# Altium PCB switch_board.PcbDoc
Units mm, origin at the board's own origin, x right, y up, seen from the top; angles counter-clockwise.
Board outline 45.57 x 37 mm, 2 copper layers (Top Layer, Bottom Layer), stack 1.571 mm thick; 11 components, 52 nets, 286 pads, 86 vias.
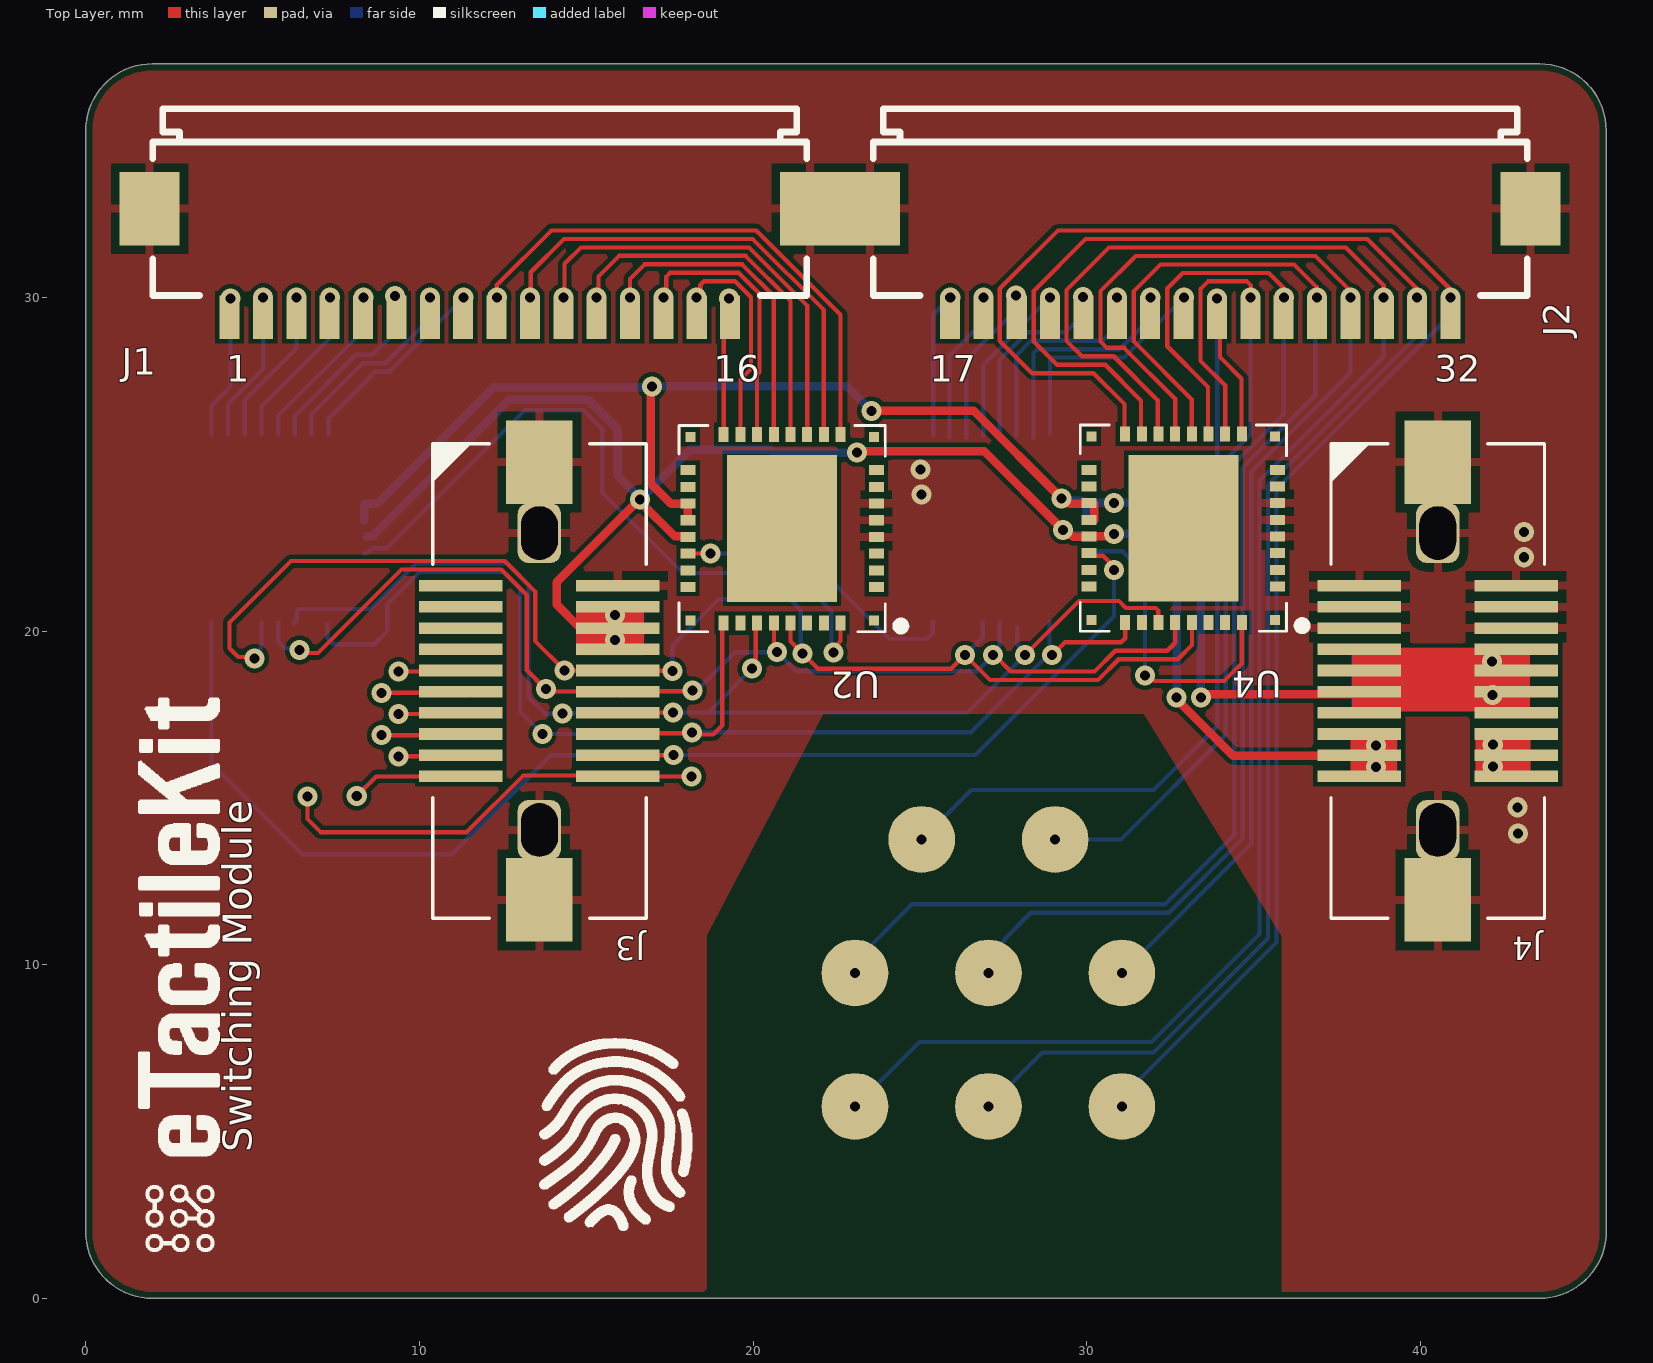
[diagram p0: Top Layer view]
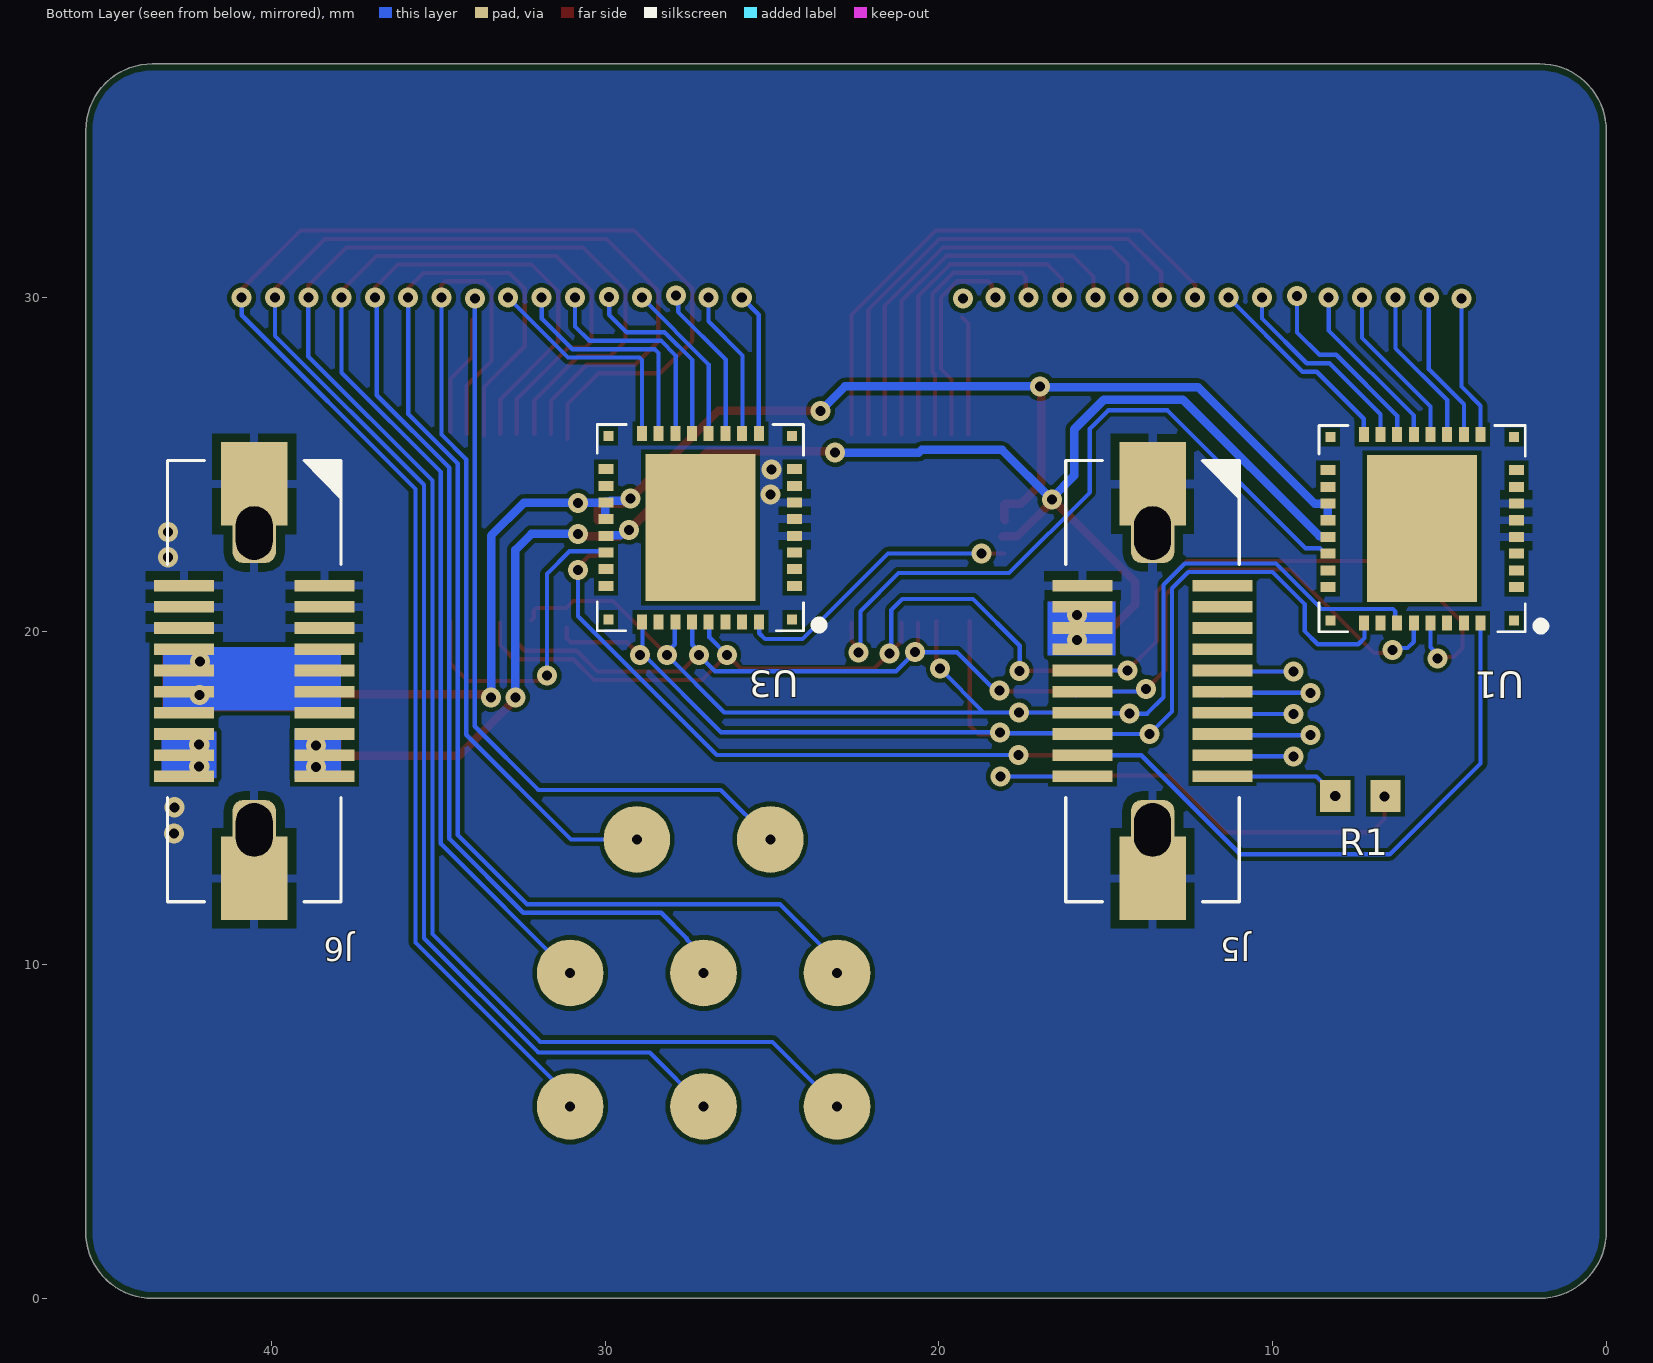
[diagram p1: Bottom Layer view, seen from below]
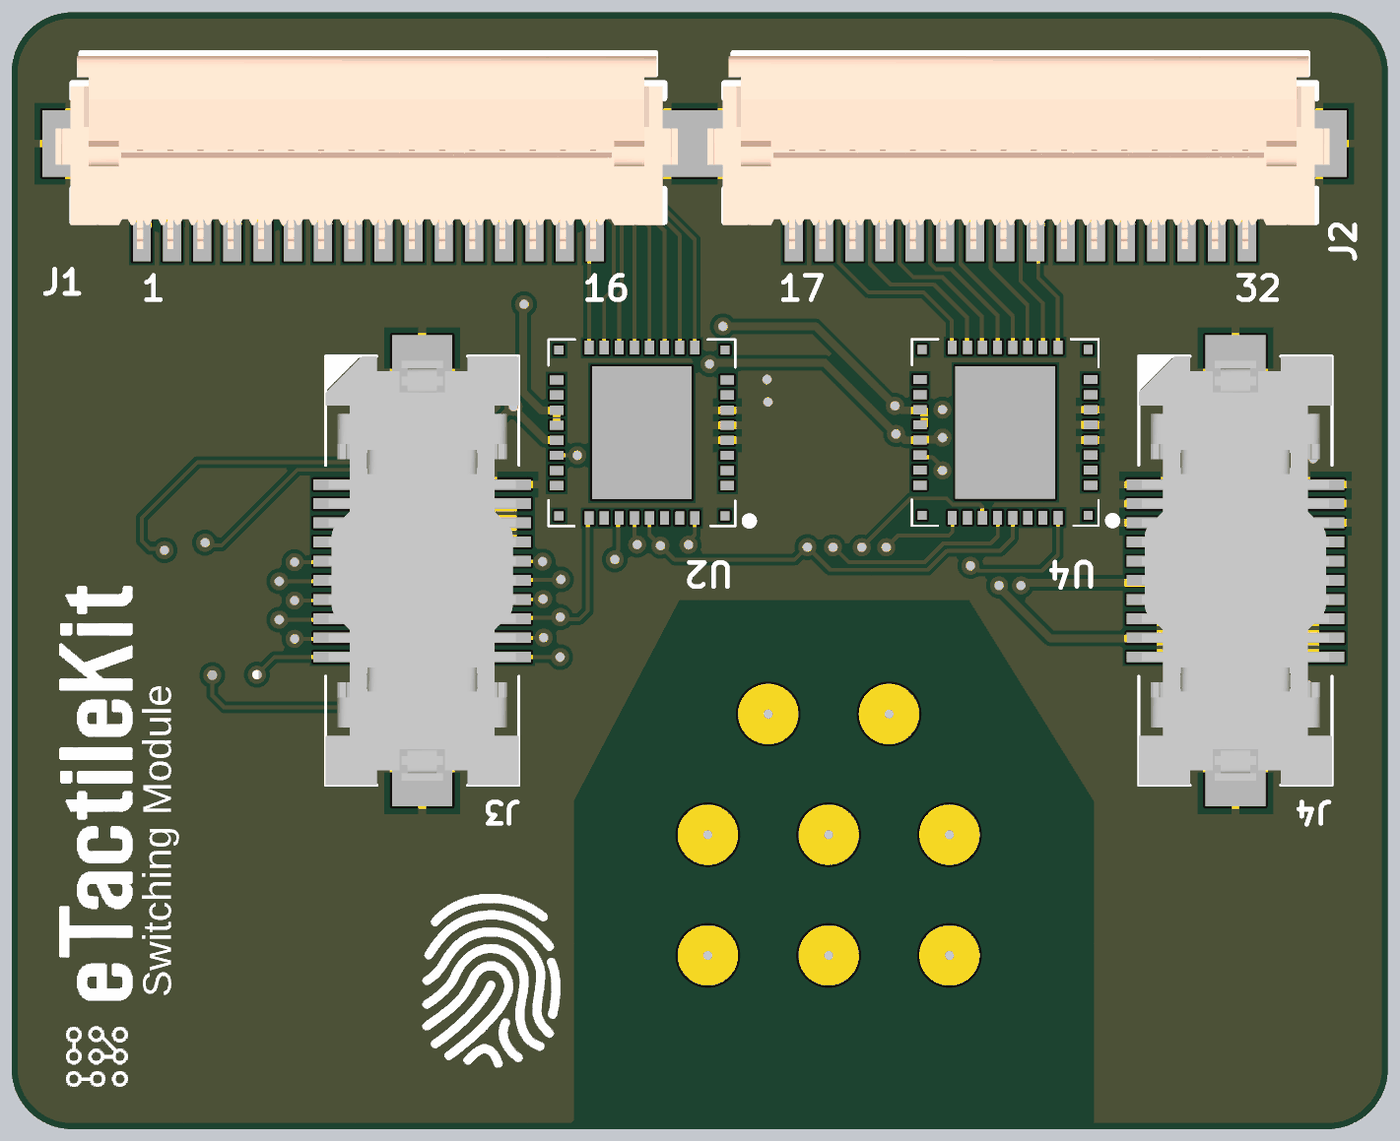
[diagram p2: 3D render of the assembled board from above, using the file's embedded part models]
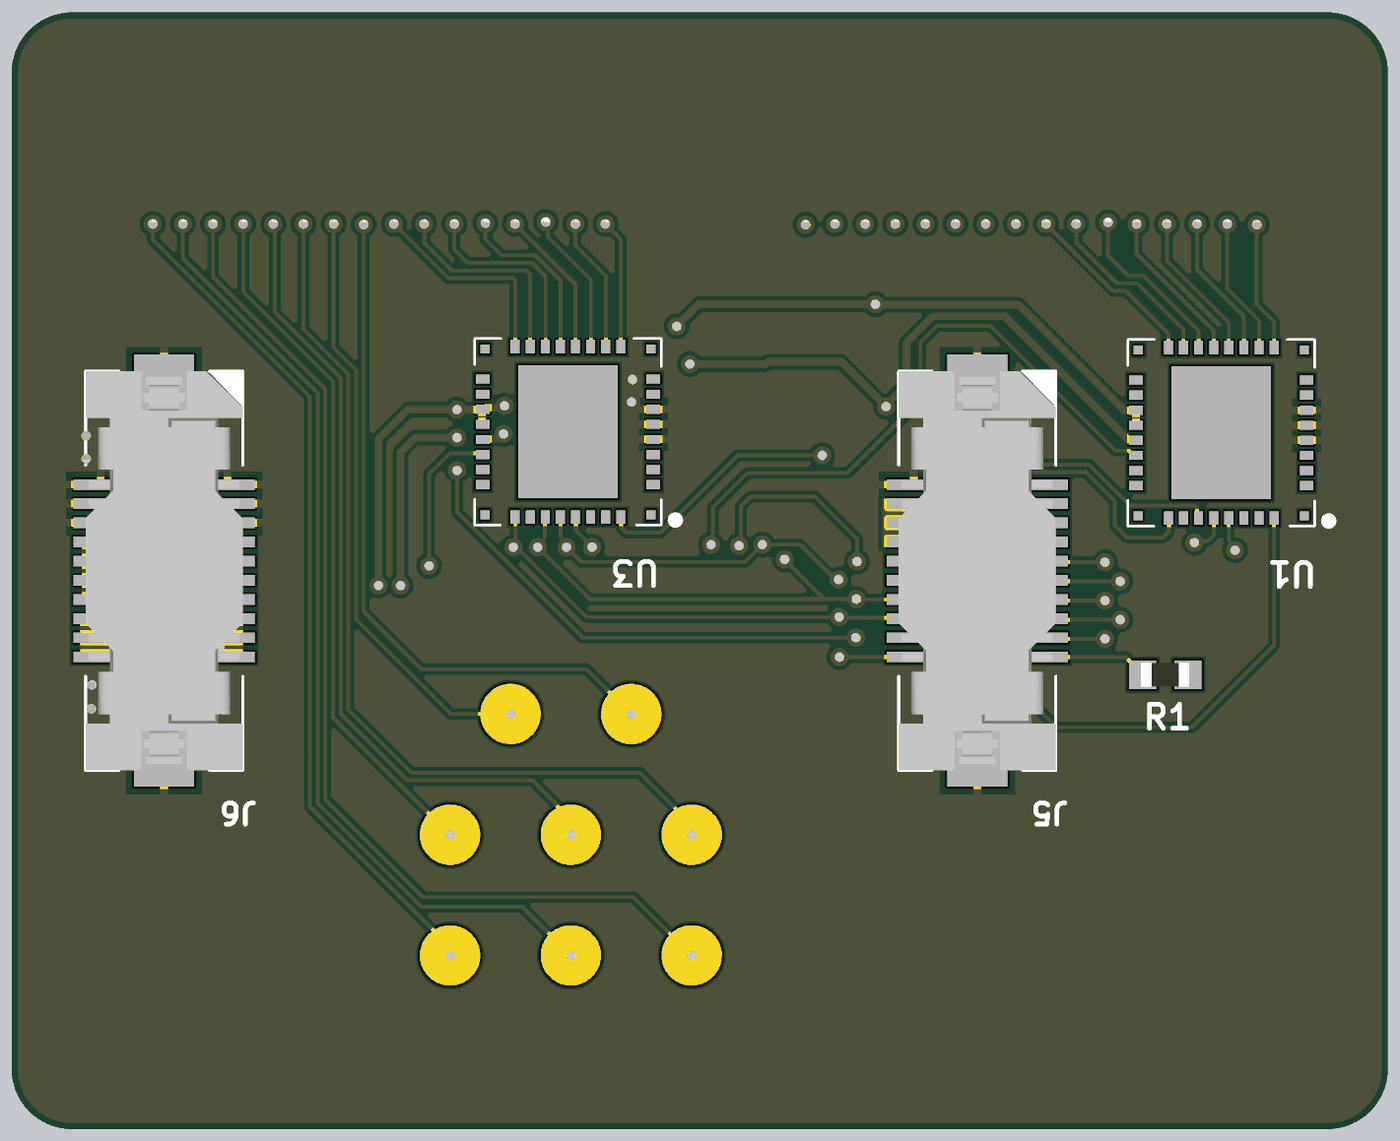
[diagram p3: 3D render of the assembled board from below, using the file's embedded part models]

## Layer stack, top to bottom
Top Solder: solder mask 0.0102, Solder Resist, Dk 3.5
Top Layer: signal copper 0.0356
Dielectric 1: dielectric 1.5, FR-4, Dk 4.8
Bottom Layer: signal copper 0.0356
Bottom Solder: solder mask 0.0102, Solder Resist, Dk 3.5

## Board outline
0,2 ccw(c2,2) 2,0 2,0.001 43.565,0.001 43.567,0 ccw(c43.567,2) 45.567,2 45.567,35 ccw(c43.567,35) 43.567,37 43.562,37.001 2,37.001 2,37 ccw(c2,35) 0,35

## Design rules (kind name [scope] priority, off if disabled: settings)
BoardOutlineClearance [All] p1: gap=0.2 ignorepadtopadclearanceinfootprint=FALSE
Clearance [All] p1: gap=0.127 ignorepadtopadclearanceinfootprint=FALSE except(0.1: Arc-Text Track-Text SMDPad-Text; 0.25: Arc-Hole Track-Hole SMDPad-Hole THPad-Hole Via-Hole Fill-Hole Poly-Hole Region-Hole Text-Hole)
ComponentClearance [All] p1: gap=0.127 collisioncheckmode=3 verticalgap=0.127 showdistances=TRUE
DiffPairsRouting [All] p1: maxlimit=0.254 minlimit=0.127 mostfreqgap=0.127 toplayer_minwidth=0.127 toplayer_maxwidth=25.4 toplayer_prefwidth=0.127 bottomlayer_minwidth=0.127 bottomlayer_maxwidth=25.4 bottomlayer_prefwidth=0.127 maxuncoupledlength=12.7
Height [All] p1: minheight=0 maxheight=1816.048 prefheight=12.7
HoleSize [All] p1: absolutevalues=TRUE maxlimit=6.3 minlimit=0.3 maxpercent=80.000 minpercent=20.000
HoleToHoleClearance [All] p1: gap=0.25 allowstackedmicrovias=FALSE
MinimumAnnularRing [All] p1: minimumring=0.076
MinimumSolderMaskSliver [All] p1: minsoldermaskwidth=0
PlaneClearance [All] p1: clearance=0.127
PlaneConnect PlaneConnectPowerPads [InPadClass('PowerPads')] p1: planeconnectstyle=Direct reliefexpansion=0.508 reliefentries=4 reliefconductorwidth=0.254 reliefairgap=0.254
PlaneConnect [All] p2: pad.planeconnectstyle=Relief pad.reliefexpansion=0.3 pad.reliefentries=4 pad.reliefconductorwidth=0.127 pad.reliefairgap=0.127 via.planeconnectstyle=Direct via.reliefexpansion=0.3 via.reliefentries=4 via.reliefconductorwidth=0.127 via.reliefairgap=0.127
PolygonConnect PolygonConnect_6 [All vs IsNamedPolygon('GND_L02_P000')] p1: thpad.connectstyle=Relief thpad.reliefconductorwidth=0.254 thpad.reliefentries=4 thpad.polygonreliefangle="90 Angle" thpad.airgapwidth=0.254 smdpad.connectstyle=Relief smdpad.reliefconductorwidth=0.254 smdpad.reliefentries=4 smdpad.polygonreliefangle="90 Angle" smdpad.airgapwidth=0.254 via.connectstyle=Direct via.reliefconductorwidth=0.254 via.reliefentries=4 via.polygonreliefangle="90 Angle" via.airgapwidth=0.254
PolygonConnect PolygonConnect_5 [All vs IsNamedPolygon('GND_L01_P001')] p2: thpad.connectstyle=Relief thpad.reliefconductorwidth=0.254 thpad.reliefentries=4 thpad.polygonreliefangle="90 Angle" thpad.airgapwidth=0.254 smdpad.connectstyle=Relief smdpad.reliefconductorwidth=0.254 smdpad.reliefentries=4 smdpad.polygonreliefangle="90 Angle" smdpad.airgapwidth=0.254 via.connectstyle=Direct via.reliefconductorwidth=0.254 via.reliefentries=4 via.polygonreliefangle="90 Angle" via.airgapwidth=0.254
PolygonConnect PolygonConnect_4 [All vs IsNamedPolygon('GND_L02_P000')] p3: connectstyle=Relief reliefconductorwidth=0.254 reliefentries=4 polygonreliefangle="90 Angle" airgapwidth=0.254
PolygonConnect PolygonConnect_3 [All vs IsNamedPolygon('GND_L01_P001')] p4: connectstyle=Relief reliefconductorwidth=0.254 reliefentries=4 polygonreliefangle="90 Angle" airgapwidth=0.254
PolygonConnect PolygonConnect_2 [All vs IsNamedPolygon('GND_L01_P001')] p5: connectstyle=Direct reliefconductorwidth=0.254 reliefentries=4 polygonreliefangle="90 Angle" airgapwidth=0.254
PolygonConnect PolygonConnect_1 [All vs IsNamedPolygon('GND_L02_P000')] p6: connectstyle=Direct reliefconductorwidth=0.254 reliefentries=4 polygonreliefangle="90 Angle" airgapwidth=0.254
PolygonConnect PolygonConnectPowerPads [All vs (InPadClass('PowerPads'))] p7: connectstyle=Direct reliefconductorwidth=0.254 reliefentries=4 polygonreliefangle="90 Angle" airgapwidth=0.254
PolygonConnect [All] p8: thpad.connectstyle=Relief thpad.reliefconductorwidth=0.127 thpad.reliefentries=4 thpad.polygonreliefangle="90 Angle" thpad.airgapwidth=0.127 smdpad.connectstyle=Relief smdpad.reliefconductorwidth=0.127 smdpad.reliefentries=4 smdpad.polygonreliefangle="90 Angle" smdpad.airgapwidth=0.127 via.connectstyle=Direct via.reliefconductorwidth=0.127 via.reliefentries=4 via.polygonreliefangle="90 Angle" via.airgapwidth=0.127
RoutingVias [All] p1: holewidth=0.3 width=0.6 viastyle="Through Hole" minholewidth=0.3 minwidth=0.6 maxholewidth=0.6 maxwidth=6.6
SilkToSilkClearance [All] p1: silktosilkclearance=0
SilkToSolderMaskClearance [IsPad] p1: minsilkscreentomaskgap=0.127 clearancetoexposedcopper=TRUE
SolderMaskExpansion [All] p1: expansion=0.075 istentingtop=FALSE
SupplyNets "Schematic Supply Nets_4" [InNet('+3V3_L')] p1: voltage=0.000
SupplyNets "Schematic Supply Nets_3" [InNet('GND')] p2: voltage=0.000
SupplyNets "Schematic Supply Nets_2" [InNet('+5V')] p3: voltage=0.000
Width [All] p1: maxlimit=25.4 minlimit=0.127 preferedwidth=0.127 minimp=50.000000 maximp=50.000000 favimp=50.000000
20 further rules are at their usual default settings.

## Classes and differential pairs
component class Switching_circuit: J1 J2 U1 U2 U3 U4
component class connectors: J3 J4 J5 J6 R1

## Components (designator, comment, footprint, x,y, rotation, side; value= is the part's Value field where it differs from the comment)
J1 "FH12-16S-1SH_55_" FH1216S1SH55 11.811,32.531 r0 top
J2 "FH12-16S-1SH_55_" FH1216S1SH55 33.401,32.531 r0 top
J3 "52885-0274" 528850274 13.594,18.501 r270 top
J4 "52885-0274" 528850274 40.518,18.501 r270 top
J5 "53647-0274" 536470274 13.594,18.501 r270 bottom
J6 "53647-0274" 536470274 40.518,18.501 r270 bottom
R1 "MCT06030C6042FP500" RESC1608X55N 7.371,15.056 r0 bottom
U1 "HV513-QFN" HV513-QFN 5.516,23.071 r0 bottom
U2 "HV513-QFN" HV513-QFN 20.869,23.071 r180 top
U3 "HV513-QFN" HV513-QFN 27.147,23.102 r0 bottom
U4 "HV513-QFN" HV513-QFN 32.897,23.083 r180 top

## Footprints (in the part's own frame and the unit in brackets; to place one, negate y for a bottom-side part, rotate by r counter-clockwise, add the part's x,y. Pads: shape width x height; smd on the part's side, far side on the other; paste and mask are expansions set on the pad)
528850274 [mm]
  rect 0.35x2.5 smd: 1(-2.857,-2.35) 2(-2.857,2.35) 3(-2.223,-2.35) 4(-2.223,2.35) 5(-1.587,-2.35) 6(-1.587,2.35) 7(-0.952,-2.35) 8(-0.952,2.35) 9(-0.317,-2.35) 10(-0.317,2.35) 11(0.317,-2.35) 12(0.317,2.35) 13(0.953,-2.35) 14(0.953,2.35) 15(1.588,-2.35) 16(1.588,2.35) 17(2.223,-2.35) 18(2.223,2.35) 19(2.857,-2.35) 20(2.857,2.35)
  rect 2.5x2 smd: 21(-6.56,0) 22(6.56,0)
  silkscreen extent -7.11,-3.2 7.11,3.2, body extent -7.11,-3.2 7.11,3.2, height 4.2
536470274 [mm]
  rect 0.35x1.8 smd: 1(-2.857,-2.1) 2(-2.857,2.1) 3(-2.223,-2.1) 4(-2.223,2.1) 5(-1.588,-2.1) 6(-1.588,2.1) 7(-0.953,-2.1) 8(-0.953,2.1) 9(-0.317,-2.1) 10(-0.317,2.1) 11(0.317,-2.1) 12(0.317,2.1) 13(0.953,-2.1) 14(0.953,2.1) 15(1.588,-2.1) 16(1.588,2.1) 17(2.223,-2.1) 18(2.223,2.1) 19(2.857,-2.1) 20(2.857,2.1)
  rect 2.5x2 smd: 21(-5.91,0) 22(5.91,0)
  silkscreen extent -6.61,-2.6 6.61,2.6, body extent -6.61,-2.6 6.61,2.6, height 7.2
FH1216S1SH55 [mm]
  rect 0.6x1.3 smd: 1(7.5,-3.125) 2(6.5,-3.125) 3(5.5,-3.125) 4(4.5,-3.125) 5(3.5,-3.125) 6(2.5,-3.125) 7(1.5,-3.125) 8(0.5,-3.125) 9(-0.5,-3.125) 10(-1.5,-3.125) 11(-2.5,-3.125) 12(-3.5,-3.125) 13(-4.5,-3.125) 14(-5.5,-3.125) 15(-6.5,-3.125) 16(-7.5,-3.125)
  rect 1.8x2.2 smd: 17(9.9,0.125) 18(-9.9,0.125)
  silkscreen extent -9.8,-2.47 9.8,3.13, body extent -10.36,-3.38 10.24,3.02, height 2.04
HV513-QFN [mm]
  rect 0.45x0.3 smd: 1(-2.825,1.75) 2(-2.825,1.25) 3(-2.825,0.75) 4(-2.825,0.25) 5(-2.825,-0.25) 6(-2.825,-0.75) 7(-2.825,-1.25) 8(-2.825,-1.75) 17(2.825,-1.75) 18(2.825,-1.25) 19(2.825,-0.75) 20(2.825,-0.25) 21(2.825,0.25) 22(2.825,0.75) 23(2.825,1.25) 24(2.825,1.75)
  rect 0.3x0.45 smd: 9(-1.75,-2.825) 10(-1.25,-2.825) 11(-0.75,-2.825) 12(-0.25,-2.825) 13(0.25,-2.825) 14(0.75,-2.825) 15(1.25,-2.825) 16(1.75,-2.825) 25(1.75,2.825) 26(1.25,2.825) 27(0.75,2.825) 28(0.25,2.825) 29(-0.25,2.825) 30(-0.75,2.825) 31(-1.25,2.825) 32(-1.75,2.825)
  rect 0.3x0.3 smd: 33(-2.75,2.75) 34(-2.75,-2.75) 35(2.75,-2.75) 36(2.75,2.75)
  rect 3.3x4.4 smd: 37(0,0)
  silkscreen extent -3.68,-3.09 3.09,3.09, body extent -2.92,-2.92 2.92,2.92, height 0.81
RESC1608X55N [mm]
  rect 0.9x0.95 smd: 1(-0.75,0) 2(0.75,0)
  body extent -0.8,-0.4 0.8,0.4, height 0.55

## Part data
J1 J2: "Connector", Arrow Part Number=FH12-16S-1SH(55), Manufacturer_Name=Hirose, Mouser Part Number=798-FH12-16S-1SH55, Arrow Price/Stock=https://www.arrow.com/en/products/fh12-16s-1sh-55/hirose-electric, Datasheet Link=https://www.hirose.com/en/product/document?clcode=CL0586-0536-8-55&productname=FH12-16S-1SH(55)&series=FH12&documenttype=2DDrawing&lang=en&documentid=0000987749, Height=2.2mm, Manufacturer_Part_Number=FH12-16S-1SH(55), Mouser Price/Stock=https://www.mouser.co.uk/ProductDetail/Hirose-Connector/FH12-16S-1SH55?qs=Ux3WWAnHpjBc3pYMMfcXYg%3D%3D
J3 J4: "Connector", Manufacturer_Name=Molex, Mouser Part Number=538-52885-0274, Datasheet Link=https://www.molex.com/webdocs/datasheets/pdf/en-us/0528850274_PCB_RECEPTACLES.pdf, Height=4mm, Manufacturer_Part_Number=52885-0274, Mouser Price/Stock=https://www.mouser.co.uk/ProductDetail/Molex/52885-0274?qs=%252BPJ3Ll1xQNYiQig4hWY5jQ%3D%3D
J5 J6: "Connector", Manufacturer_Name=Molex, Mouser Part Number=538-53647-0274, Datasheet Link=https://www.molex.com/pdm_docs/sd/536470274_sd.pdf, Height=7mm, Manufacturer_Part_Number=53647-0274, Mouser Price/Stock=https://www.mouser.co.uk/ProductDetail/Molex/53647-0274?qs=8nk6kXN3TSGT9To7JpUGHA%3D%3D
R1: "Resistor", Manufacturer_Name=Vishay, Datasheet Link=http://www.vishay.com/docs/28705/mcx0x0xpro.pdf, Height=0.55mm, Manufacturer_Part_Number=MCT06030C6042FP500

## Free pads (board coordinates)
  round 2 hole 0.3: 1(25.051,13.753) 2(29.051,13.753) 3(23.051,9.753) 4(27.051,9.753) 5(31.051,9.753) 6(23.051,5.753) 7(27.051,5.753) 8(31.051,5.753)
  rrect50% 1.3x1.8 hole 1.1 slot 1.6 at 90 deg: 10(13.594,14.04) 10(13.594,22.937) 10(40.518,14.04) 10(40.518,22.937)

## Via types
v1: diameter 0.6, hole 0.3, Top Layer to Bottom Layer, tented both sides, 86 vias

## Nets (pads, with @x,y where several pads share a name; then routed paths per layer and width w, separated by ;. In a path a pad name is that pad's centre, name@x,y a point inside that pad or via, vN(x,y) a via of type N, cw(c..) or ccw(c..) an arc to the next point about the centre after c; other vN are vias at no path point)
+3V3_L: J4.16 J4.18 J4.20 J6.15 J6.17 J6.19
  other v1: 42.166,15.938 42.166,16.593
+5V: J3.4 J3.6 J3.8 J4.15 J4.17 J4.19 J5.3 J5.5 J5.7 J6.16 J6.18 J6.20 U1.21 U2.21 U3.21 U4.21 | length 49.9
  Top Layer w0.254: J3.6@15.944,20.067 15.674,19.797 15.575,19.797 15.236,20.136 14.769,20.136 14.114,20.791 14.114,21.469 16.581,23.936 v1(16.614,23.936) ; v1@16.643,23.907 16.643,23.847 17.654,22.836 18.09,22.836 U2.21@18.103,22.823 ; v1(23.107,25.349) 23.152,25.393 26.921,25.393 v1(29.28,23.034) 29.373,23.034 29.587,22.821 U4.21@30.219,22.821 ; U4.21@30.215,22.84 30.221,22.846 30.754,22.846 v1(30.82,22.912) ; v1(32.692,18.012) 32.692,17.955 34.39,16.257 J4.17@38.144,16.257
  Bottom Layer w0.254: U1.21@8.426,22.831 8.439,22.844 8.598,22.844 12.686,26.931 15.057,26.931 15.942,26.046 15.942,24.659 16.614,23.987 v1(16.614,23.936) 18.104,25.426 20.52,25.426 20.598,25.349 v1(23.107,25.349) ; v1(29.28,23.034) 29.373,23.034 29.533,22.875 U3.21@29.992,22.875 ; v1(30.82,22.912) 32.213,22.912 32.692,22.434 v1(32.692,18.012)
  other v1: 38.67,15.919 38.662,16.574 15.861,19.735 15.855,20.474
\S\T\A\C\K\_\S\E\N\S\E\: J3.20 J5.19 R1.1 | length 15.5
  Top Layer w0.127: v1(6.645,15.043) 6.645,14.365 7.037,13.973 11.365,13.973 11.417,13.973 13.114,15.669 15.944,15.669 15.972,15.641 18.157,15.641 v1(18.159,15.639)
  Bottom Layer w0.127: J5.19 15.697,15.641 18.157,15.641 v1(18.159,15.639)
BL: J3.16 J5.15 U1.25 U2.25 U3.25 U4.25 | length 38.8
  Top Layer w0.127: J3.16 15.97,16.939 18.14,16.939 v1(18.167,16.966) 18.233,16.9 18.807,16.9 19.075,17.168 U2.25@19.075,20.297 ; v1(28.958,19.279) 29.343,19.664 31.029,19.664 31.151,19.786 U4.25@31.151,20.103
  Bottom Layer w0.127: U1.25@7.245,20.211 7.245,19.792 7.432,19.606 8.645,19.606 9.038,19.999 9.038,20.806 10,21.768 12.528,21.768 13.014,21.282 13.014,17.587 v1(13.691,16.91) 13.692,16.912 15.693,16.912 J5.15 15.72,16.939 18.14,16.939 v1(18.167,16.966) 26.527,16.966 v1@28.841,19.279 ; U3.25@28.883,20.29 28.883,19.354 v1(28.958,19.279)
CLK: J3.12 J5.11 U1.28 U2.28 U3.28 U4.28 | length 37.6
  Top Layer w0.127: v1(6.406,19.431) 6.496,19.341 6.831,19.341 6.833,19.339 6.96,19.339 9.465,21.844 12.452,21.844 13.214,21.083 13.214,18.83 v1(13.787,18.257) 13.854,18.19 J3.12@15.309,18.19 ; J3.12@15.311,18.187 15.322,18.198 18.173,18.198 v1(18.187,18.212) ; U2.28@20.627,20.246 20.627,19.45 v1(20.711,19.365) ; v1(27.195,19.279) 27.229,19.279 27.719,18.789 30.233,18.789 30.854,19.41 32.412,19.41 32.651,19.649 U4.28@32.651,20.103
  Bottom Layer w0.127: U1.28 5.766,19.679 5.953,19.492 6.345,19.492 v1(6.406,19.431) ; v1(13.787,18.257) 13.859,18.185 15.22,18.185 15.246,18.159 15.828,18.159 J5.11@15.914,18.072 ; v1(18.187,18.212) 18.303,18.212 19.456,19.365 v1(20.711,19.365) 21.282,18.795 26.71,18.795 v1(27.195,19.279) 27.195,19.392 27.392,19.59 U3.28@27.392,20.265
DIN_1: J5.17 U1.32 | length 18.8
  Bottom Layer w0.127: U1.32 3.766,16.032 6.485,13.313 10.97,13.313 13.935,16.278 J5.17@16.021,16.278
DIN_2: U1.22 U2.32 | length 21.6
  Top Layer w0.127: v1(22.411,19.361) 22.411,19.489 22.619,19.698 U2.32
  Bottom Layer w0.127: U1.22 8.416,22.32 8.575,22.48 9.014,22.48 13.148,26.614 14.925,26.614 15.475,26.064 15.475,24.156 17.895,21.736 21.211,21.736 22.352,20.595 22.352,19.42 v1(22.411,19.361)
DIN_3: U2.22 U3.32 | length 8.8
  Top Layer w0.127: U2.22 18.047,22.323 18.727,22.323 v1(18.729,22.325)
  Bottom Layer w0.127: v1(18.729,22.325) 21.524,22.325 24.09,19.759 25.206,19.759 25.383,19.936 25.383,20.263 U3.32
DIN_4: U3.22 U4.32 | length 9.6
  Top Layer w0.127: v1(31.745,18.665) 31.873,18.665 32.036,18.502 34.117,18.502 34.642,19.028 U4.32@34.642,20.287
  Bottom Layer w0.127: U3.22@29.92,22.392 31.066,22.392 31.745,21.714 v1(31.745,18.665)
DOUT: J3.18 U4.22 | length 18.8
  Top Layer w0.127: J3.18 15.947,16.281 17.612,16.281 v1(17.615,16.283) ; U4.22@30.219,22.32 30.281,22.258 30.488,22.258 30.818,21.927 v1(30.818,21.824)
  Bottom Layer w0.127: v1(17.615,16.283) 26.656,16.283 30.818,20.445 v1@30.818,21.823
GND: J1.17 J1.18 J2.17 J2.18 J3.2 J3.21 J3.22 J4.1 J4.2 J4.3 J4.4 J4.5 J4.6 J4.21 J4.22 J5.1 J5.21 J5.22 J6.1 J6.2 J6.3 J6.4 J6.5 J6.6 J6.21 J6.22 pad.10 U1.4 U1.5 U1.6 U2.4 U2.5 U2.6 U3.4 U3.5 U3.6 U4.4 U4.5 U4.6
  other v1: 42.926,13.928 42.911,14.719 43.1,22.212 43.1,22.974 25.042,24.092 25.01,24.839
HVL_BL: J3.15 J5.16 | length 5.9
  Top Layer w0.127: v1(8.86,16.879) J3.15@11.654,16.879
  Bottom Layer w0.127: v1(8.86,16.879) J5.16@11.947,16.879
HVL_CLK: J3.11 J5.12 | length 5.2
  Top Layer w0.127: v1(8.86,18.149) J3.11@11.433,18.149
  Bottom Layer w0.127: v1(8.86,18.149) 11.412,18.149 J5.12@11.489,18.072
HVL_DIOB: J3.17 J5.18 | length 5
  Top Layer w0.127: v1(9.368,16.244) J3.17@12.329,16.244
  Bottom Layer w0.127: v1(9.368,16.244) J5.18@11.447,16.244
HVL_LE: J3.9 J5.10 | length 5
  Top Layer w0.127: v1(9.368,18.784) 11.686,18.784 J3.9@11.735,18.833
  Bottom Layer w0.127: v1(9.368,18.784) J5.10@11.999,18.784
HVL_POL: J3.13 J5.14 | length 5.1
  Top Layer w0.127: v1(9.368,17.514) J3.13@12.333,17.514
  Bottom Layer w0.127: v1(9.368,17.514) 11.463,17.514 J5.14@11.495,17.547
LE: J3.10 J5.9 U1.29 U2.29 U3.29 U4.29 | length 43.6
  Top Layer w0.127: v1(5.06,19.182) 5.017,19.224 4.569,19.224 4.309,19.484 4.309,20.259 6.148,22.098 12.558,22.098 13.468,21.188 13.468,19.703 v1(14.353,18.818) 14.883,18.818 14.89,18.812 17.572,18.812 v1(17.578,18.805) ; U2.29 21.119,19.693 v1(21.482,19.331) 21.942,18.871 25.934,18.871 v1(26.348,19.285) 27.098,18.535 30.338,18.535 30.959,19.156 32.725,19.156 33.151,19.581 U4.29@33.151,20.251
  Bottom Layer w0.127: v1(5.06,19.182) 5.06,19.31 5.266,19.516 U1.29 ; v1(14.353,18.818) J5.9@16.506,18.818 ; v1(17.578,18.805) 17.578,19.561 18.973,20.957 21.099,20.957 21.428,20.628 21.428,19.385 v1(21.482,19.331) ; v1(26.348,19.285) 26.88,19.817 U3.29@26.88,20.271
OUT1_1: J1.16 U1.9 | length 4.3
  Bottom Layer w0.127: U1.9 3.766,26.753 4.341,27.328 v1(4.341,29.968)
OUT1_2: J1.15 U1.10 | length 4.8
  Bottom Layer w0.127: U1.10 4.266,26.796 5.318,27.848 v1(5.318,29.991) v1@5.076,29.991
OUT1_3: J1.14 U1.11 | length 5
  Bottom Layer w0.127: U1.11 4.766,26.921 6.318,28.473 v1(6.318,29.991) v1@6.076,29.991
OUT1_4: J1.13 U1.12 | length 5.2
  Bottom Layer w0.127: U1.12 5.266,26.729 7.318,28.781 v1(7.318,29.991) v1@7.076,29.991
OUT1_5: J1.12 U1.13 | length 5.4
  Bottom Layer w0.127: U1.13 5.766,26.456 8.318,29.009 v1(8.318,29.991) v1@8.076,29.991
OUT1_6: J1.11 U1.14 | length 5.7
  Bottom Layer w0.127: U1.14 6.266,26.453 8.092,28.279 8.594,28.279 9.265,28.95 v1(9.265,30.044)
OUT1_7: J1.10 U1.15 | length 6.2
  Bottom Layer w0.127: U1.15 6.766,26.497 8.294,28.025 8.975,28.025 10.318,29.368 v1(10.318,29.991) v1@10.076,29.991
OUT1_8: J1.9 U1.16 | length 6.3
  Bottom Layer w0.127: U1.16 7.266,26.361 8.676,27.771 9.099,27.771 v1(11.319,29.991) v1@11.076,29.991
OUT2_1: J1.8 U2.9 | length 16
  Top Layer w0.127: v1(12.319,29.991) 12.319,30.372 13.952,32.006 20.092,32.006 22.619,29.478 U2.9
OUT2_2: J1.7 U2.10 | length 14.6
  Top Layer w0.127: v1(13.317,29.991) 13.333,29.991 13.335,29.993 13.335,30.753 14.333,31.752 19.987,31.752 22.119,29.619 U2.10
OUT2_3: J1.6 U2.11 | length 13.1
  Top Layer w0.127: v1(14.314,29.991) 14.349,29.991 14.351,29.993 14.351,31.007 14.841,31.498 19.881,31.498 21.619,29.76 U2.11
OUT2_4: J1.5 U2.12 | length 11.3
  Top Layer w0.127: v1(15.312,29.991) 15.365,29.991 15.367,29.993 15.367,30.626 15.984,31.244 19.776,31.244 21.119,29.901 U2.12
OUT2_5: J1.4 U2.13 | length 9.6
  Top Layer w0.127: v1(16.31,29.991) 16.31,30.554 16.746,30.99 19.671,30.99 20.619,30.041 U2.13
OUT2_6: J1.3 U2.14 | length 8.1
  Top Layer w0.127: v1(17.308,29.991) 17.397,29.991 17.399,29.993 17.399,30.626 17.508,30.736 19.566,30.736 20.193,30.109 20.193,27.753 20.119,27.68 U2.14
OUT2_7: J1.2 U2.15 | length 6.5
  Top Layer w0.127: v1(18.306,29.991) 18.413,29.991 18.415,29.993 18.415,30.372 18.524,30.482 19.46,30.482 19.939,30.004 19.939,27.858 19.619,27.539 U2.15
OUT2_8: J1.1 U2.16 | length 3.8
  Top Layer w0.127: J1.1@19.05,29.991 19.257,29.991 v1(19.28,29.968) ; U2.16 19.119,29.215 J1.1
OUT3_1: J2.16 U3.9 | length 4.4
  Bottom Layer w0.127: U3.9@25.398,25.849 25.398,29.481 v1(25.908,29.991)
OUT3_2: J2.15 U3.10 | length 4.6
  Bottom Layer w0.127: U3.10@25.886,25.811 25.886,28.261 26.908,29.283 26.908,29.984 v1(26.901,29.991)
OUT3_3: J2.14 U3.11 | length 4.9
  Bottom Layer w0.127: U3.11@26.386,25.811 26.386,28.14 27.813,29.567 27.813,29.989 v1(27.882,30.057)
OUT3_4: J2.13 U3.12 | length 5
  Bottom Layer w0.127: U3.12@26.9,25.843 26.9,27.99 v1(28.901,29.991)
OUT3_5: J2.12 U3.13 | length 5.8
  Bottom Layer w0.127: U3.13@27.388,25.869 27.388,28.119 28.225,28.956 29.357,28.956 29.882,29.48 v1(29.882,30.018)
OUT3_6: J2.11 U3.14 | length 6.6
  Bottom Layer w0.127: U3.14@27.889,25.856 27.889,28.261 28.33,28.702 30.48,28.702 30.908,29.13 v1(30.908,29.991)
OUT3_7: J2.10 U3.15 | length 7.1
  Bottom Layer w0.127: U3.15@28.402,25.785 28.402,28.333 28.517,28.448 30.988,28.448 31.899,29.359 31.899,29.981 v1(31.908,29.991)
OUT3_8: J2.9 U3.16 | length 7
  Bottom Layer w0.127: U3.16 28.897,28.12 28.971,28.194 31.111,28.194 v1(32.909,29.991)
OUT4_1: J2.8 pad.1 U4.9 | length 26.8
  Top Layer w0.127: J2.8 33.99,29.317 33.99,28.209 34.639,27.56 U4.9@34.639,25.968
  Bottom Layer w0.127: pad.1 26.538,15.24 32.004,15.24 33.909,17.145 v1(33.909,29.972)
OUT4_2: J2.7 pad.2 U4.10 | length 26.5
  Top Layer w0.127: U4.10 34.147,27.361 33.41,28.098 33.41,30.255 33.635,30.48 34.798,30.48 34.925,30.353 34.925,29.993 34.908,29.993 v1(34.907,29.991)
  Bottom Layer w0.127: pad.2 31.025,13.753 34.163,16.891 34.163,25.146 34.907,25.89 v1(34.907,29.991)
OUT4_3: J2.6 pad.3 U4.11 | length 39.1
  Top Layer w0.127: U4.11@33.628,25.863 33.628,27.317 32.41,28.535 32.41,30.271 32.873,30.734 35.452,30.734 35.904,30.282 v1(35.904,29.991)
  Bottom Layer w0.127: pad.3 23.051,10.097 24.765,11.811 32.343,11.811 34.417,13.885 34.417,25.019 35.904,26.506 v1(35.904,29.991)
OUT4_4: J2.5 pad.4 U4.12 | length 38.2
  Top Layer w0.127: U4.12 33.147,26.94 31.41,28.677 31.41,30.187 32.212,30.988 36.214,30.988 36.902,30.3 v1(36.902,29.991)
  Bottom Layer w0.127: pad.4 27.051,10.256 27.559,10.764 27.559,10.795 28.321,11.557 32.455,11.557 34.671,13.773 34.671,24.892 36.846,27.067 36.846,29.935 v1(36.902,29.991)
OUT4_5: J2.4 pad.5 U4.13 | length 37.1
  Top Layer w0.127: U4.13 32.647,26.96 31.12,28.487 30.6,28.487 30.41,28.677 30.41,30.187 31.465,31.242 36.849,31.242 37.9,30.191 v1(37.9,29.991)
  Bottom Layer w0.127: pad.5 34.925,13.627 34.925,24.765 37.9,27.74 v1(37.9,29.991)
OUT4_6: J2.3 pad.6 U4.14 | length 51.8
  Top Layer w0.127: U4.14@32.127,25.902 32.127,26.914 30.808,28.233 29.854,28.233 29.391,28.696 29.391,30.221 30.666,31.496 37.758,31.496 38.898,30.356 v1(38.898,29.991)
  Bottom Layer w0.127: pad.6 24.984,7.686 31.943,7.686 35.179,10.922 35.179,24.511 38.898,28.23 v1(38.898,29.991)
OUT4_7: J2.2 pad.7 U4.15 | length 51
  Top Layer w0.127: U4.15@31.627,25.902 31.627,26.904 30.552,27.979 29.108,27.979 28.41,28.677 28.41,30.194 29.966,31.75 38.404,31.75 39.896,30.258 v1(39.896,29.991)
  Bottom Layer w0.127: pad.7 28.664,7.366 32.004,7.366 35.433,10.795 35.433,24.384 39.896,28.847 v1(39.896,29.991)
OUT4_8: J2.1 pad.8 U4.16 | length 50.7
  Top Layer w0.127: U4.16@31.127,25.756 31.127,26.8 30.202,27.725 28.362,27.725 27.391,28.696 27.391,30.26 29.135,32.004 39.135,32.004 40.894,30.245 v1(40.894,29.991)
  Bottom Layer w0.127: pad.8 31.051,6.032 35.687,10.668 35.687,24.257 40.894,29.464 v1(40.894,29.991)
POL: J3.14 J5.13 U1.27 U2.27 U3.27 U4.27 | length 38.4
  Top Layer w0.127: J3.14 15.951,17.555 17.591,17.555 v1(17.598,17.563) ; v1(19.971,18.875) 20.062,18.965 20.062,19.17 20.078,19.186 U2.27@20.078,20.3 ; v1(28.147,19.279) 29.767,20.899 30.961,20.899 31.168,20.692 32.065,20.692 32.139,20.618 32.139,20.4 U4.27@32.213,20.326
  Bottom Layer w0.127: U1.27@6.227,20.223 6.319,20.315 6.319,20.587 6.394,20.661 8.534,20.661 9.895,22.022 12.633,22.022 13.268,21.387 13.268,18.014 13.758,17.524 v1(14.293,17.524) 14.305,17.536 15.682,17.536 J5.13 15.701,17.555 17.591,17.555 v1(17.598,17.563) 18.659,17.563 ; v1(19.971,18.875) 18.659,17.563 ; U3.27@27.916,20.098 27.916,19.601 28.147,19.37 v1(28.147,19.279) 26.431,17.563 18.659,17.563
STACK_SENSE: J3.19 J5.20 R1.2 | length 6.4
  Top Layer w0.127: v1(8.121,15.056) 8.709,15.644 J3.19@10.6,15.644
  Bottom Layer w0.127: R1.2@8.121,15.015 8.121,15.081 8.684,15.644 J5.20
Vpp: J4.7 J4.8 J4.9 J4.10 J4.11 J4.12 J4.13 J4.14 J6.7 J6.8 J6.9 J6.10 J6.11 J6.12 J6.13 J6.14 U1.19 U1.20 U2.19 U2.20 U3.19 U3.20 U4.19 U4.20 | length 47.6
  Top Layer w0.254: v1(16.966,27.331) 16.934,27.299 16.934,24.422 17.545,23.811 18.031,23.811 18.044,23.798 18.044,23.343 U2.20@18.024,23.323 ; v1(23.549,26.599) 26.614,26.599 v1(29.247,23.966) 29.341,23.966 29.486,23.821 30.219,23.821 U4.20@30.219,23.32 ; v1(33.419,18.012) 33.512,18.012 33.6,18.1 38.082,18.1 38.168,18.186 40.271,18.186 40.622,18.536
  Bottom Layer w0.254: U1.20 U1.19 ; U1.19@8.452,23.821 8.739,23.821 12.23,27.312 16.947,27.312 v1(16.966,27.331) 22.817,27.331 v1(23.549,26.599) ; v1(29.247,23.966) 29.314,23.9 29.849,23.9 29.874,23.875 29.994,23.875 30.023,23.846 30.814,23.846 v1(30.82,23.84) 32.44,23.84 33.419,22.862 v1(33.419,18.012) ; 29.992,23.522 U3.19@29.992,23.816
  other v1: 42.16,18.088 42.142,19.081
pads on no net: J3.1 J3.3 J3.5 J3.7 J5.2 J5.4 J5.6 J5.8 U1.1 U1.2 U1.3 U1.7 U1.8 U1.17 U1.18 U1.23 U1.24 U1.26 U1.30 U1.31 U1.33 U1.34 U1.35 U1.36 U1.37 U2.1 U2.2 U2.3 U2.7 U2.8 U2.17 U2.18 U2.23 U2.24 U2.26 U2.30 U2.31 U2.33 U2.34 U2.35 U2.36 U2.37 U3.1 U3.2 U3.3 U3.7 U3.8 U3.17 U3.18 U3.23 U3.24 U3.26 U3.30 U3.31 U3.33 U3.34 U3.35 U3.36 U3.37 U4.1 U4.2 U4.3 U4.7 U4.8 U4.17 U4.18 U4.23 U4.24 U4.26 U4.30 U4.31 U4.33 U4.34 U4.35 U4.36 U4.37

## Polygon pours and split planes (outlines as drawn)
GND on Bottom Layer "GND_L02_P000" (solid, pour order 0): 0,37 0,0.001 45.567,0.001 45.567,37
GND on Top Layer "GND_L01_P001" (solid, pour order 1): 0,37 45.567,37 45.567,0.001 0,0.001

## Other copper
Top Layer:
  rectangle net +5V: 37.906,15.552 39.303,16.822
  rectangle net Vpp: 37.955,17.584 43.289,19.489
  rectangle net +3V3_L: 41.646,15.575 43.297,16.972
  region net +5V: 16.719,20.89 14.704,20.899 14.704,19.293 16.719,19.293
  pour cut-out: 18.616,10.88 22.106,17.523 31.703,17.523 35.835,10.859 35.835,-0.077 18.616,-0.077
Bottom Layer:
  rectangle net +5V: 37.914,15.552 39.311,17.076
  rectangle net +5V: 14.708,19.269 16.74,20.886
  rectangle net Vpp: 37.916,17.621 43.25,19.526
  rectangle net +3V3_L: 41.643,15.595 43.294,16.992

## Silkscreen, mask and mechanical layers (free items; w line width, h text height)
Top Overlay:
  drawing of 27 lines, arcs and shapes, not listed
  text "1" at 4.217,27.477 h0.8
  text "16" at 18.822,27.477 h0.8
  text "17" at 25.299,27.477 h0.8
  text "32" at 40.412,27.477 h0.8
  text "Switching Module" at 5.27,4.377 h1.5 r90
Mechanical 1:
  lines w0.254: 2,37 ccw(c2,35) 0,35 0,2 ccw(c2,2) 2,0 43.565,0.001 ; 2,37.001 43.562,37.001 ; 43.567,0 ccw(c43.567,2) 45.567,2 45.567,35 ccw(c43.567,35) 43.567,37